# EAGLE board board (EAGLE 9.1.3)
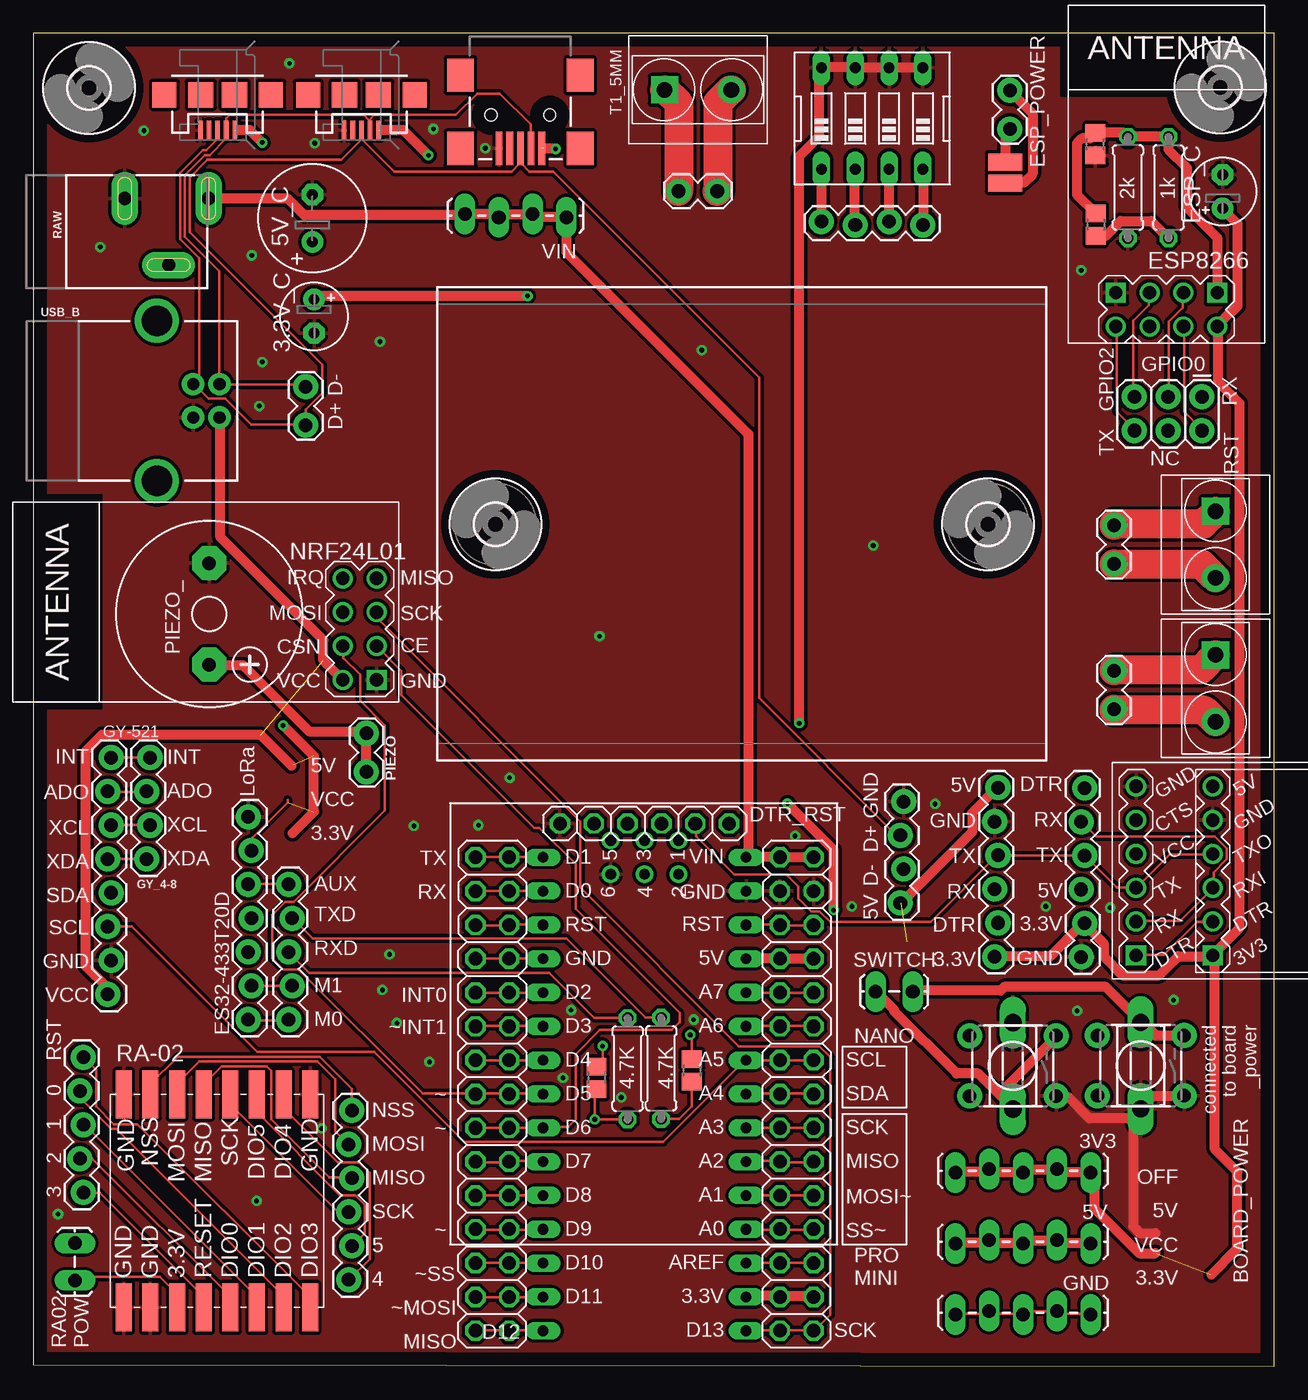
[diagram p0: board, top side]
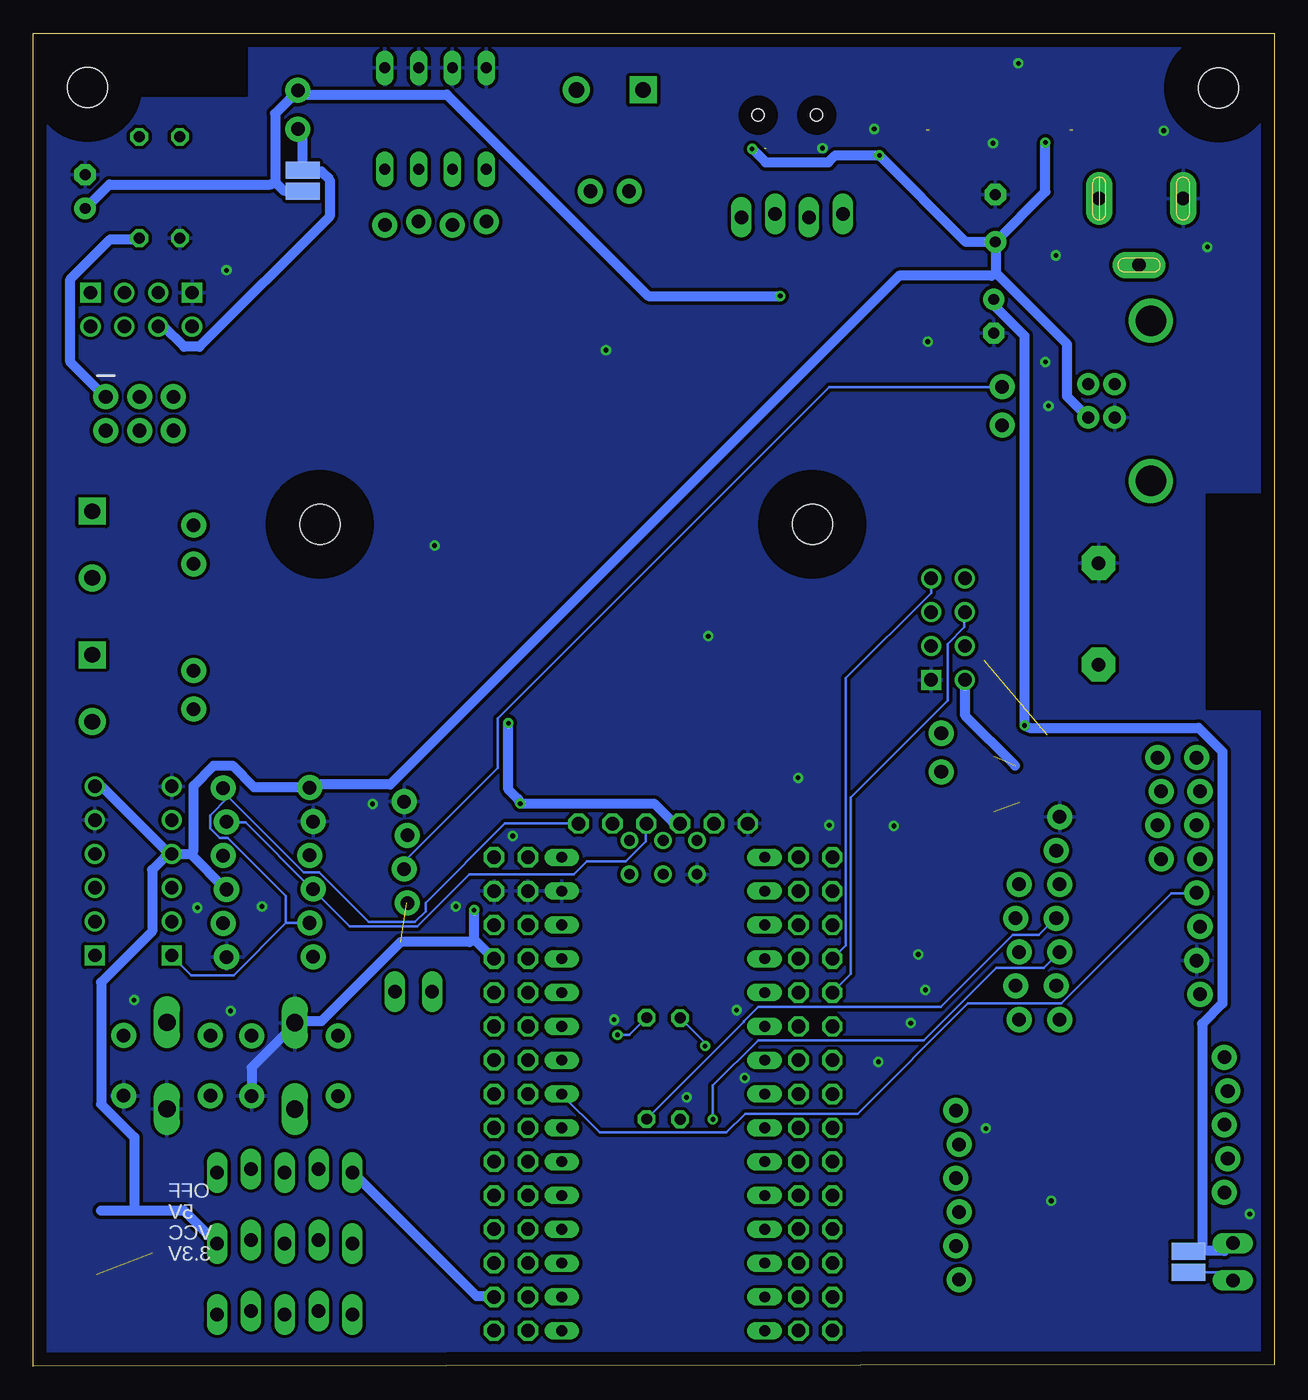
[diagram p1: board, bottom side, seen from below]

Size 93.2 x 100.13 mm. Coordinates in mm from the lower left corner, seen from the top.
Outline: 0,0.13 93.2,0 93.2,100.13 0,100.13 0,0.13
Copper layers (1*16): Top 0.035mm / dielectric 1.5mm / Bottom 0.035mm
Design rules "default": minimum track width 6mil, minimum drill 0.35mm, track to track 6mil, track to pad 6mil, pad to pad 6mil, via to via 6mil, smd to smd 6mil, copper to edge 40mil, drill to drill 6mil, minimum pad ring 10mil, minimum via ring 8mil, stop-mask expansion 4mil, vias tented up to drill 0mil, thermal gap 10mil
Net classes: 0 default: width 0.203 mm, drill 0.127 mm, clearance 0.152 mm; 1 power: width 0.762 mm, clearance 0.254 mm; 2 terminal: width 2.159 mm, clearance 0.305 mm
tRestrict: area 0.5,49.4 to 5.1,65.5; area 77.1,95.4 to 92.6,99.2
bRestrict: area 0.5,49.4 to 5.1,65.5; area 77.1,95.4 to 92.6,99.2

## Footprints (pad centres in the part's own frame; a part is rotated, then mirrored left to right if it is on the bottom)
1X05_LOCK_LONGPADS = drill 1.016 long: 1 0,0; 2 2.54,-0.254; 3 5.08,0; 4 7.62,-0.254; 5 10.16,0
E2,5-5 = drill 0.813 pad 1.6: + -1.27,0 | drill 0.813 pad 1.6 octagon: - 1.27,0
E3,5-8 = drill 0.813 pad 1.6: + -1.778,0 | drill 0.813 pad 1.6 octagon: - 1.778,0
USB-SERIAL-CP2102 = drill 1 square: 1 8.89,6.35 | drill 1: 2 8.89,3.81; 3 8.89,1.27; 4 8.89,-1.27; 5 8.89,-3.81; 6 8.89,-6.35
1X07_LOCK = drill 1.016 pad 1.88: 1 0,0.127; 2 2.54,-0.127; 3 5.08,0.127; 4 7.62,-0.127; 5 10.16,0.127; 6 12.7,-0.127; 7 15.24,0.127
0207/7 = drill 0.813 octagon: 1 -3.81,0; 2 3.81,0
R2012 = smd 1.3 x 1.5: 1 -0.85,0; 2 0.85,0
WIRELESS-WIFI-ESP-01 = drill 1 square: A1 -8.89,3.81; D1 -8.89,-3.81 | drill 1: A2 -11.43,3.81; B1 -8.89,1.27; B2 -11.43,1.27; C1 -8.89,-1.27; C2 -11.43,-1.27; D2 -11.43,-3.81
2X3 = drill 1.016 pad 1.88: 1 0,0; 2 0,2.54; 3 2.54,0; 4 2.54,2.54; 5 5.08,0; 6 5.08,2.54
1X02_LOCK = drill 1.016 pad 1.88: 1 -0.178,0; 2 2.718,0
1X08_LOCK = drill 1.016 pad 1.88: 1 0,0.127; 2 2.54,-0.127; 3 5.08,0.127; 4 7.62,-0.127; 5 10.16,0.127; 6 12.7,-0.127; 7 15.24,0.127; 8 17.78,-0.127
1X04_LOCK = drill 1.016 pad 1.88: 1 0,0.127; 2 2.54,-0.127; 3 5.08,0.127; 4 7.62,-0.127
3,0 = hole 3: 0,0
1X05_LOCK = drill 1.016 pad 1.88: 1 0,0.127; 2 2.54,-0.127; 3 5.08,0.127; 4 7.62,-0.127; 5 10.16,0.127
1X02_LOCK_LONGPADS = drill 1.016 long: 1 -0.127,0; 2 2.667,0
1X06_LOCK = drill 1.016 pad 1.88: 1 0,0; 2 2.54,-0.254; 3 5.08,0; 4 7.62,-0.254; 5 10.16,0; 6 12.7,-0.254
USB-MICROB = smd 1.4 x 0.35: D+ -2.65,0; D- -2.65,-0.65; GND -2.65,1.3; ID -2.65,0.65; VBUS -2.65,-1.3 | smd 1.9 x 1.8: MT1 0,-4; MT2 0,4 | smd 1.9 x 1.9: P$1 0,-1.27; P$2 0,1.27
USB-MINIB = smd 2.5 x 0.5: D+ 2.5,0; D- 2.5,0.8; GND 2.5,-1.6; ID 2.5,-0.8; VBUS 2.5,1.6 | smd 2.5 x 2: S1 -3,4.5; S2 2.5,4.5; S3 -3,-4.5; S4 2.5,-4.5 | hole 0.9: 0,2.2; 0,-2.2
NANO = drill 0.8 long: 3.3V -10.16,24.13; 5V -10.16,-1.27; A0 -10.16,19.05; A1 -10.16,16.51; A2 -10.16,13.97; A3 -10.16,11.43; A4 -10.16,8.89; A5 -10.16,6.35; A6 -10.16,3.81; A7 -10.16,1.27; AREF -10.16,21.59; D2 5.08,1.27; D3 5.08,3.81; D4 5.08,6.35; D5 5.08,8.89; D6 5.08,11.43; D7 5.08,13.97; D8 5.08,16.51; D9 5.08,19.05; D10 5.08,21.59; D11 5.08,24.13; D12 5.08,26.67; D13 -10.16,26.67; GND -10.16,-6.35; GND1 5.08,-1.27; RAW -10.16,-8.89; RST -10.16,-3.81; RST1 5.08,-3.81; RX1 5.08,-6.35; TX0 5.08,-8.89 | drill 0.8: ICSP1 -5.08,-10.16; ICSP2 -5.08,-7.62; ICSP3 -2.54,-10.16; ICSP4 -2.54,-7.62; ICSP5 0,-10.16; ICSP6 0,-7.62
WIRELESS-NRF24L01 = drill 1 square: 1 -12.7,6.35 | drill 1: 2 -10.16,6.35; 3 -12.7,3.81; 4 -10.16,3.81; 5 -12.7,1.27; 6 -10.16,1.27; 7 -12.7,-1.27; 8 -10.16,-1.27
SMD1,27-2,54 = smd 1.27 x 2.54: 1 0,0
2X15 = drill 1.016 octagon: 1 -17.78,-1.27; 2 -17.78,1.27; 3 -15.24,-1.27; 4 -15.24,1.27; 5 -12.7,-1.27; 6 -12.7,1.27; 7 -10.16,-1.27; 8 -10.16,1.27; 9 -7.62,-1.27; 10 -7.62,1.27; 11 -5.08,-1.27; 12 -5.08,1.27; 13 -2.54,-1.27; 14 -2.54,1.27; 15 0,-1.27; 16 0,1.27; 17 2.54,-1.27; 18 2.54,1.27; 19 5.08,-1.27; 20 5.08,1.27; 21 7.62,-1.27; 22 7.62,1.27; 23 10.16,-1.27; 24 10.16,1.27; 25 12.7,-1.27; 26 12.7,1.27; 27 15.24,-1.27; 28 15.24,1.27; 29 17.78,-1.27; 30 17.78,1.27
F/CM12P = drill 1.016 pad 2.54 octagon: + 3.81,0; - -3.81,0
1X06/OCT = drill 1.016 octagon: 1 -6.35,0; 2 -3.81,0; 3 -1.27,0; 4 1.27,0; 5 3.81,0; 6 6.35,0
LORA-RA2-SMD = smd 3.6 x 1.2: 1 -8,7; 2 -8,5; 3 -8,3; 4 -8,1; 5 -8,-1; 6 -8,-3; 7 -8,-5; 8 -8,-7; 9 8,-7; 10 8,-5; 11 8,-3; 12 8,-1; 13 8,1; 14 8,3; 15 8,5; 16 8,7
POWER_JACK_SLOT = drill 1 pad 2 long: GND@1 2.58,7.5; GND@2 7.58,10.8; PWR 2.58,13.8
TACTILE_SWITCH_PTH_6.0MM = drill 1.016 pad 1.88: 1 -3.251,2.261; 2 3.251,2.261; 3 -3.251,-2.261; 4 3.251,-2.261
DTS-3 = drill 1.3 long: 1 -3.25,0; 2 3.25,0
EDG-04 = drill 0.813 long: 1 -3.81,-3.81; 2 -1.27,-3.81; 3 1.27,-3.81; 4 3.81,-3.81; 5 3.81,3.81; 6 1.27,3.81; 7 -1.27,3.81; 8 -3.81,3.81
H2-5.0-10.5X8.0MM = drill 1.168 pad 2.032 square: 1 0,2.5 | drill 1.168 pad 2.032: 2 0,-2.5
USB-SERIAL-FT232R = drill 1 square: 1 11.43,6.35 | drill 1: 2 11.43,3.81; 3 11.43,1.27; 4 11.43,-1.27; 5 11.43,-3.81; 6 11.43,-6.35
USB-B-PTH = drill 0.914 pad 1.676: D+ 4,1.25; D- 5.981,1.25; GND 4,-1.25; VBUS 5.981,-1.25 | drill 2.286: SHLD1 1.282,-6.02; SHLD2 1.282,6.02
1X04_LOCK_LONGPADS = drill 1.016 long: 1 0,0; 2 2.54,-0.254; 3 5.08,0; 4 7.62,-0.254

## Placement (x,y rotation side)
3.3V  [1X05_LOCK_LONGPADS]  79.4,14.55 180 top
3.3V_C  [E2,5-5]  21.08,78.87 270 top
5V  [1X05_LOCK_LONGPADS]  79.4,9.22 180 top
5V_C  [E3,5-8]  20.95,86.23 90 top
B1  BREADBOARDMINI  [BREADBOARD-MINI]  53.19,63.27 180 top
CP2102_USB-SERIAL  USB-SERIAL-CP2102  [USB-SERIAL-CP2102]  97.46,37.21 180 top
ES32-433T20D  [1X07_LOCK]  16.26,26.04 90 top
ESP1  1k  [0207/7]  85.24,88.54 270 top
ESP1_1  [R2012]  79.78,85.75 270 top
ESP2  2k  [0207/7]  82.19,88.54 90 top
ESP2_1  [R2012]  79.76,91.8 90 top
ESP8266  [WIRELESS-WIFI-ESP-01]  85.09,89.53 90 top
ESP_C  [E2,5-5]  89.31,88.24 90 top
ESP_H  [2X3]  87.76,72.82 180 top
ESP_POW  [1X02_LOCK]  73.33,95.66 270 top
GND  [1X05_LOCK_LONGPADS]  79.4,3.89 180 top
GY-521  [1X08_LOCK]  5.71,27.94 90 top
GY_4-8  [1X04_LOCK]  8.64,45.72 270 top
H1  MOUNT-HOLE3.0  [3,0]  4.19,96.01 0 top
H2  MOUNT-HOLE3.0  [3,0]  89.13,96.06 0 top
H3  MOUNT-HOLE3.0  [3,0]  71.68,63.25 90 top
H4  MOUNT-HOLE3.0  [3,0]  34.7,63.25 270 top
J1  [1X05_LOCK]  19.3,26.04 90 top
J2  [1X02_LOCK_LONGPADS]  65.91,28.14 180 top
J3  [1X02_LOCK_LONGPADS]  3.12,9.12 270 top
J4  [1X04_LOCK]  66.8,85.85 180 top
J5  [1X06_LOCK]  23.93,19.2 270 top
J6  [1X05_LOCK]  3.63,23.22 270 top
J7  [1X06_LOCK]  78.69,30.73 90 top
J8  [1X04_LOCK]  65.23,34.8 90 top
J9  [1X06_LOCK]  72.19,30.76 90 top
MICRO_1  [USB-MICROB]  24.64,95.5 90 top
MICRO_2  [USB-MICROB]  13.84,95.5 90 top
MINI_1  USB_MINI-B_SMT  [USB-MINIB]  36.58,93.98 270 top
NANO  NANO  [NANO]  43.36,29.34 180 top
NRF24L01  [WIRELESS-NRF24L01]  13.08,57.91 180 top
PAD1  [SMD1,27-2,54]  72.97,88.87 90 top
PAD2  [SMD1,27-2,54]  72.97,90.45 90 top
PAD3  [SMD1,27-2,54]  6.45,8.64 90 bottom
PAD4  [SMD1,27-2,54]  6.45,7.06 90 bottom
PAD5  [SMD1,27-2,54]  72.97,88.27 90 bottom
PAD6  [SMD1,27-2,54]  72.97,89.84 90 bottom
PH1  [2X15]  57.33,20.45 90 top
PH2  [2X15]  34.47,20.45 90 top
PIEZO  [1X02_LOCK]  25.02,44.83 90 top
PIEZO_  [F/CM12P]  13.21,56.52 270 top
PIN1  [1X02_LOCK]  51.18,88.27 180 top
PIN2  [1X02_LOCK]  81.15,60.45 90 top
PIN3  [1X02_LOCK]  81.15,49.53 90 top
PROMINI_H  [1X06/OCT]  45.9,40.77 0 top
R1  4.7k  [0207/7]  47.14,22.38 270 top
R1_1  [R2012]  49.45,22.22 270 top
R2  4.7K  [0207/7]  44.63,22.35 270 top
R2_1  [R2012]  42.29,21.67 270 top
RA-02  [LORA-RA2-SMD]  13.79,12.42 90 top
RAW  [POWER_JACK_SLOT]  -0.64,90.3 270 top
S1  MOMENTARY-SWITCH-SPST-PTH-6.0MM  [TACTILE_SWITCH_PTH_6.0MM]  83.16,22.58 180 top
S2  MOMENTARY-SWITCH-SPST-PTH-6.0MM  [TACTILE_SWITCH_PTH_6.0MM]  73.56,22.56 180 top
S3  DTS-3  [DTS-3]  83.16,22.58 90 top
S4  DTS-3  [DTS-3]  73.56,22.56 90 top
SW1  [EDG-04]  62.99,93.73 0 top
T1_5MM  5mm  [H2-5.0-10.5X8.0MM]  49.91,95.88 90 top
T2_5MM  5mm  [H2-5.0-10.5X8.0MM]  88.77,61.72 0 top
T3_5MM  5mm  [H2-5.0-10.5X8.0MM]  88.77,50.93 0 top
U$1  USB-SERIAL-FT232R  [USB-SERIAL-FT232R]  94.23,37.21 180 top
USB_B  [USB-B-PTH]  8,72.52 0 top
USB_DATA  [1X02_LOCK]  20.45,73.41 270 top
VIN  [1X04_LOCK_LONGPADS]  32.41,86.56 0 top

## Library data of the parts
3.3V 5V ES32-433T20D ESP_POW GND GY-521 J1-J3 J5-J7 J9 PIEZO PIN1-PIN3 USB_DATA = SparkFun-Connectors
3.3V_C ESP_C = rcl; SPICEPREFIX: C
5V_C = resistor
B1 = SparkFun-Boards; PROD_ID: COMP-12034
CP2102_USB-SERIAL ESP8266 NRF24L01 U$1 = diy-modules
ESP1 ESP1_1 ESP2 ESP2_1 R1 R1_1 R2 R2_1 = rcl; SPICEPREFIX: R
ESP_H = SparkFun-Connectors; PROD_ID: CONN-11566; VALUE: FEMALE 2x3
GY_4-8 J4 J8 VIN = SparkFun-Connectors; PROD_ID: CONN-09696
H1-H4 = holes
MICRO_1 MICRO_2 = SparkFun-Connectors; PROD_ID: CONN-09505; SF_ID: PRT-08533
MINI_1 = SparkFun-Connectors; PROD_ID: CONN-08193; SF_ID: PRT-00587
NANO = Arduino-clone
PAD1-PAD6 = wirepad
PH1 PH2 = pinhead
PIEZO_ = buzzer; OC_FARNELL: unknown; OC_NEWARK: unknown
PROMINI_H = pinhead_v2
RA-02 = LikeCircuit
RAW = SparkFun-Connectors; PROD_ID: PRT-00119
S1 S2 = SparkFun-Switches; PROD_ID: SWCH-08441; SF_SKU: COM-00097
S3 S4 = switch-tact
SW1 = special
T1_5MM T2_5MM T3_5MM = Seeed-Connector
USB_B = SparkFun-Connectors; PROD_ID: CONN-08278; SF_ID: PRT-00139

## Nets
3.3V [power]: 3.3V.1 3.3V.2 3.3V.3 3.3V.4 3.3V.5 3.3V_C.+ CP2102_USB-SERIAL.1 ES32-433T20D.6 ESP8266.D2 ESP_C.+ ESP_POW.1 J3.1 J7.2 J9.1 NANO.3.3V NRF24L01.2 PAD1.1 PAD3.1 PAD5.1 PH1.3 PH1.4
5V [power]: 5V.1 5V.2 5V.3 5V.4 5V.5 5V_C.+ CP2102_USB-SERIAL.6 GY-521.1 J7.3 J8.1 J9.6 MICRO_1.VBUS MICRO_2.VBUS MINI_1.VBUS NANO.5V PH1.23 PH1.24 PROMINI_H.3 U$1.4 USB_B.VBUS
A5: GY-521.3 NANO.A5 PH1.17 PH1.18
A6: NANO.A6 PH1.19 PH1.20
A7: NANO.A7 PH1.21 PH1.22
CE_NRF: NANO.D6 NRF24L01.3 PH2.13 PH2.14
CSN_NRF: NANO.D5 NRF24L01.4 PH2.15 PH2.16
D+_5PIN: J8.3 MICRO_1.D+ MICRO_2.D+ MINI_1.D+ USB_B.D+ USB_DATA.2
D-_5PIN: J8.2 MICRO_1.D- MICRO_2.D- MINI_1.D- USB_B.D- USB_DATA.1
GND [power]: 3.3V_C.- 5V_C.- CP2102_USB-SERIAL.5 ES32-433T20D.7 ESP2.1 ESP2_1.1 ESP8266.A1 ESP_C.- GY-521.2 J7.1 J8.4 J9.5 MICRO_1.GND MICRO_2.GND MINI_1.GND NANO.GND NANO.ICSP6 NRF24L01.1 PH1.27 PH1.28 PIEZO_.- PROMINI_H.1 RA-02.1 RA-02.2 RA-02.9 RA-02.16 RAW.GND@1 S1.1 S2.1 S3.1 S4.2 SW1.5 SW1.6 SW1.7 SW1.8 U$1.6 USB_B.GND
MISO_NRF: NANO.GND1 NRF24L01.7 PH2.23 PH2.24
MOSI_NRF: NANO.D2 NRF24L01.6 PH2.21 PH2.22
N$1: ES32-433T20D.2 J1.2
N$2: GY-521.5 GY_4-8.4
N$3: NANO.AREF PH1.5 PH1.6
N$4: NANO.A0 PH1.7 PH1.8
N$5: NANO.A1 PH1.9 PH1.10
N$6: NANO.A2 PH1.11 PH1.12
N$7: NANO.A3 PH1.13 PH1.14
N$8: GY-521.6 GY_4-8.3
N$9: GY-521.7 GY_4-8.2
N$10: GY-521.8 GY_4-8.1
N$12: ES32-433T20D.1 J1.1
N$13: J1.4 R1.1 R1_1.1
N$14: J1.3 R2.1 R2_1.1
N$15: ES32-433T20D.4 R1.2 R1_1.2
N$16: NANO.D12 PH2.1 PH2.2
N$17: NANO.D11 PH2.3 PH2.4
N$18: NANO.D10 PH2.5 PH2.6
N$19: NANO.D9 PH2.7 PH2.8
N$20: NANO.D8 PH2.9 PH2.10
N$21: NANO.D7 PH2.11 PH2.12
N$22: ES32-433T20D.5 J1.5
N$23 [terminal]: PIN1.2 T1_5MM.1
N$24: NANO.D4 PH2.17 PH2.18
N$25: NANO.D3 PH2.19 PH2.20
N$26 [terminal]: PIN1.1 T1_5MM.2
N$27 [terminal]: PIN2.2 T2_5MM.1
N$28: NANO.RST1 PH2.25 PH2.26
N$29: NANO.RX1 PH2.27 PH2.28
N$30: NANO.TX0 PH2.29 PH2.30
N$31 [terminal]: PIN2.1 T2_5MM.2
N$32 [terminal]: PIN3.2 T3_5MM.1
N$33 [terminal]: PIN3.1 T3_5MM.2
N$34 [power]: PIEZO.1 PIEZO.2 PIEZO_.+
N$35: GND.1 GND.2 GND.3 GND.4 GND.5
N$37 [power]: J2.1 S1.3 S3.2
N$38: ES32-433T20D.3 R2.2 R2_1.2
N$39 [power]: J4.1 SW1.4
N$40 [power]: J4.2 SW1.3
N$41 [power]: J4.3 SW1.2
N$42 [power]: J4.4 SW1.1
N$43 [power]: J2.2 S2.3 S4.1
N$44: J6.1 RA-02.8
N$45: J6.2 RA-02.7
N$46: J6.3 RA-02.6
N$47: J6.4 RA-02.5
N$48: J6.5 RA-02.4
N$49: J5.1 RA-02.15
N$50: J5.2 RA-02.14
N$51: J5.3 RA-02.13
N$52: J5.4 RA-02.12
N$53: J5.5 RA-02.11
N$54: J5.6 RA-02.10
N$55 [power]: ESP8266.B2 ESP_POW.2 PAD2.1 PAD6.1
N$57: CP2102_USB-SERIAL.3 J7.5 J9.3 PROMINI_H.4 U$1.2
N$58 [power]: ESP1.1 ESP1_1.1 ESP2.2 ESP2_1.2 ESP8266.D1
N$59: ESP8266.C2 ESP_H.2
N$60: ESP8266.C1 ESP_H.3
N$61 [power]: ESP1.2 ESP1_1.2 ESP_H.1
N$62: CP2102_USB-SERIAL.4 J7.4 J9.4 PROMINI_H.5 U$1.3
N$63: ESP8266.B1 ESP_H.5
N$64: ESP8266.A2 ESP_H.6
N$66: CP2102_USB-SERIAL.2 J7.6 J9.2 PROMINI_H.6 U$1.1
N$76: J3.2 PAD4.1 RA-02.3
RST: NANO.RST PH1.25 PH1.26
SCK_NRF: NANO.D13 NRF24L01.5 PH1.1 PH1.2
SDA_GY521: GY-521.4 NANO.A4 PH1.15 PH1.16
VIN [power]: NANO.RAW PH1.29 PH1.30 RAW.PWR VIN.1 VIN.2 VIN.3 VIN.4

## Tracks (layer width: path | path; a pad name or v marks a point on that pad's centre or on a via)
3.3V  (via drill 0.35)  (3 unrouted)
  Top 0.203: 19.11,42.53 19.11,42.35 16.45,39.69 16.45,38.8 ES32-433T20D.6
  Top 0.762: v18.76,48.13 21.07,45.82 21.07,41.64 19.47,40.04 | PAD1.1 72.99,88.94 74.41,88.94 75.03,89.56 75.03,94.09 73.34,95.78 ESP_POW.1 | ESP_C.+ 89.34,86.89 90.41,85.83 90.41,79.6 90.06,79.25 89.97,79.25 88.9,78.18 ESP8266.D2 88.99,77.74 88.99,73.91 90.59,72.31 90.59,32.93 88.81,31.15 CP2102_USB-SERIAL.1 | CP2102_USB-SERIAL.1 88.54,30.8 85.97,30.8 84.54,29.38 81.79,29.38 80.37,30.8 80.37,31.77 78.94,33.2 J7.2 78.59,33.02 76.36,30.8 72.19,30.8 J9.1 | NANO.3.3V 53.52,5.28 56.01,5.28 PH1.4 56.45,5.28 58.59,5.28 PH1.3 | 3.3V.5 69.25,14.62 71.56,14.62 71.74,14.79 3.3V.4 72.1,14.62 74.32,14.62 3.3V.3 74.68,14.79 76.81,14.79 3.3V.2 77.17,14.62 79.39,14.62 3.3V.1 79.65,14.26 79.65,11.86 83.03,8.48 84.28,8.48 | 88.46,6.88 90.41,8.84 90.41,14.62 88.72,16.31 88.72,30.44 CP2102_USB-SERIAL.1 | v37.11,80.39 21.41,80.39 21.16,80.14 3.3V_C.+
  Bottom 0.762: J3.1 3.2,9.2 3.73,8.66 6.4,8.66 PAD3.1 5.42,9.02 5.42,25.73 3.91,27.24 3.91,46.18 5.69,47.96 18.4,47.96 v18.76,48.13 18.76,77.38 21.07,79.69 21.07,80.14 3.3V_C.+ | 75.03,88.94 74.41,88.32 72.99,88.32 PAD5.1 | 75.03,88.94 75.03,94.09 73.34,95.78 ESP_POW.1 73.08,95.52 62.14,95.52 47.02,80.39 v37.11,80.39 | 75.03,88.94 75.39,88.76 87.48,88.76 89.26,86.98 ESP_C.+ | PH1.3 58.67,5.28 59.92,5.28 69.16,14.53 3.3V.5 | 19.47,45.11 23.2,48.84 23.2,51.51 NRF24L01.2
5V  (via drill 0.35)  (5 unrouted)
  Top 0.762: 5V.5 69.25,9.28 71.56,9.28 71.74,9.46 5V.4 72.1,9.28 74.32,9.28 5V.3 74.68,9.46 76.81,9.46 5V.2 77.17,9.28 79.39,9.28 5V.1 | J8.1 65.16,34.8 70.5,40.13 70.5,41.55 72.36,43.42 J9.6 | 19.38,45.11 17.07,47.42 5.16,47.42 3.91,46.18 3.91,30.09 5.51,28.49 5.51,27.95 GY-521.1 | 23.2,51.6 21.78,53.02 21.78,54.53 14.05,62.27 14.05,71.25 USB_B.VBUS | v17.2,91.92 16.26,92.85 15.35,92.85 | v29.67,90.96 27.77,92.85 26.15,92.85 | v39.22,91.44 38.35,91.44 38.31,91.48 | NANO.5V 53.52,30.62 56.01,30.62 PH1.24 56.45,30.62 58.59,30.62 PH1.23 | v56.63,42.27 60.1,38.8 v60.1,34.27 | 59.03,97.21 59.03,92.41 57.52,90.89 v57.52,48.31
  Bottom 0.762: 85.61,11.68 81.88,11.68 79.48,9.28 5V.1 | 85.61,11.68 88.1,11.68 | 81.34,38.44 82.77,38.44 U$1.4 | 81.34,38.44 78.77,35.87 J7.3 | CP2102_USB-SERIAL.6 88.54,43.51 88.01,43.51 83.12,38.62 U$1.4 | 81.34,38.44 81.17,38.8 81.17,43.6 79.65,45.11 78.23,45.11 76.63,43.51 72.45,43.51 J9.6 72.1,43.69 66.41,43.69 28.18,81.91 21.25,81.91 20.89,82.09 | 85.61,11.68 85.61,12.04 85.61,17.2 88.1,19.68 88.1,28.84 84.28,32.66 84.28,37.29 83.3,38.27 U$1.4 | 20.89,82.09 20.89,84.4 5V_C.+ | 20.89,82.09 15.56,76.76 15.56,72.85 14.05,71.34 USB_B.VBUS | 5V_C.+ 17.2,88.21 v17.2,91.92 | 5V_C.+ 23.16,84.45 v29.67,90.96 32.96,90.96 33.49,90.43 38.2,90.43 v39.22,91.44 | 60.1,32.04 v60.1,34.27 | 60.1,32.04 58.67,30.62 PH1.23 | PROMINI_H.3 44.63,40.84 45.16,40.84 46.58,42.27 v56.63,42.27 56.81,42.62 57.52,43.33 v57.52,48.31 | 73.17,25.91 71.56,25.91 65.61,31.86 60.45,31.86 60.1,32.04
A5
  Top 0.203: PH1.17 58.59,22.97 56.1,22.97 PH1.18 56.01,22.97 53.52,22.97 NANO.A5 53.43,22.97 47.3,16.84 32.36,16.84 25.6,23.6 16.8,23.6 7.38,33.02 GY-521.3
A6
  Top 0.203: NANO.A6 53.52,25.55 56.01,25.55 PH1.20 56.1,25.55 58.59,25.55 PH1.19
A7
  Top 0.203: NANO.A7 53.52,28.04 56.01,28.04 PH1.22 56.1,28.04 58.59,28.04 PH1.21
CE_NRF
  Top 0.203: NRF24L01.3 27.64,52.23 27.64,50.42 37.6,40.45 38,40.45 40.72,37.73 40.72,34.35 48.54,26.53 48.54,25.82 48.5,25.82 47.93,25.25 42.53,25.25 40.72,23.44 40.72,18.55 40.16,18 38.32,18 NANO.D6 PH2.13 PH2.14
CSN_NRF
  Top 0.203: NANO.D5 38.23,20.48 35.74,20.48 PH2.15 35.65,20.48 33.25,20.48 PH2.16 33.16,20.48 29.25,20.48 19.91,29.82 18.76,29.82 17.96,30.62 17.96,33.91 18.94,34.89 19.56,34.89 26.4,41.73 26.4,48.13 24.54,50 24.54,51.96 23.29,53.2 23.29,54.09 NRF24L01.4
D+_5PIN
  Top 0.203: MICRO_2.D+ 13.78,92.85 13.78,92.14 12.98,91.34 12.71,91.34 11.02,89.65 11.02,84.67 12.45,83.25 12.45,74.27 12,73.82 USB_B.D+ 12.09,73.74 13.16,72.67 14.4,72.67 16.36,70.71 20.45,70.71 USB_DATA.2 20.45,70.8 20.45,71.87 21.69,73.11 21.69,75.25 11.73,85.2 11.73,89.29 13.07,90.63 23.11,90.63 24.62,92.14 24.71,92.14 | 24.71,92.14 24.71,92.85 MICRO_1.D+ | 24.71,92.14 27.11,89.74 35.92,89.74 36.54,90.36 36.54,91.43 MINI_1.D+ 36.63,90.36 37.25,89.74 39.03,89.74 54.5,74.27 54.5,50.18 64.72,39.95 65.08,39.95 J8.3
D-_5PIN
  Top 0.203: 25.2,93.6 25.25,93.56 25.25,92.94 MICRO_1.D- | 25.2,93.6 24.8,94 14.76,94 14.49,93.74 14.49,92.94 MICRO_2.D- 14.49,92.76 14.49,92.23 13.25,90.98 12.89,90.98 11.38,89.47 11.38,84.85 13.96,82.27 13.96,73.82 USB_B.D- 14.05,73.74 20.36,73.74 20.45,73.65 USB_DATA.1 | MINI_1.D- 37.34,91.52 37.34,93.29 35.03,95.61 33.34,95.61 31.74,94 25.6,94 25.25,93.65 25.2,93.6
  Bottom 0.203: J8.2 65.34,37.38 65.34,37.91 58.32,44.93 58.32,48.67 33.43,73.56 20.45,73.56 USB_DATA.1
GND  (via drill 0.35)
  Top 0.762: S1.1 84.1,20.31 83.21,19.42 S3.1 | 84.28,10 83.12,10 82.59,10.53 82.59,18.53 83.03,18.97 S3.1 | S2.1 76.81,20.22 77.7,20.22 79.3,18.62 82.23,18.62 S3.1 | SW1.8 59.21,97.56 61.7,97.56 SW1.7 62.05,97.56 64.19,97.56 SW1.6 64.63,97.56 66.76,97.56 SW1.5
  Bottom 0.762: S2.1 76.81,22.44 73.52,25.73 S4.2
  other vias: 21.67,17.86 21.13,91.87 33.93,91.49 16.76,12.42 26.75,30.94 29.74,22.86 49.58,26.04 17.2,75.44 16.97,72.14 30.05,92.94 50.19,76.33 27.3,25.78 39.78,21.67 57.2,39.83 26.21,28.27 63.07,61.65 42.52,54.84 35.76,44.2 28.57,40.59 33.43,40.64 5.03,84.07 16.41,83.44 19.23,97.87 8.31,92.81 78.69,82.32 80.87,34.44 85.62,27.51 78.38,26.7 40.39,26.75 1.85,11.43 26.04,76.96 67.72,42.24 61.47,34.54 76.02,34.54 44.15,20.19
  pour Top: 0.13,100.08 0.13,0.13 93.22,0.13 93.22,100.08
  pour Bottom: 0,99.95 0,0 93.22,0 93.22,99.95 0,100.08
MISO_NRF
  Top 0.203: NANO.GND1 38.23,30.62 35.74,30.62 PH2.23 35.65,30.62 33.25,30.62 PH2.24
  Bottom 0.203: NRF24L01.7 25.78,59.16 25.78,58.09 32.18,51.69 32.18,31.6 33.16,30.62 PH2.24
MOSI_NRF
  Top 0.203: NANO.D2 38.23,28.04 35.74,28.04 PH2.21 35.65,28.04 33.25,28.04 PH2.22
  Bottom 0.203: NRF24L01.6 23.29,56.58 23.29,55.51 24.54,54.27 24.54,50 31.83,42.71 31.83,29.46 33.16,28.13 PH2.22
N$1
  Top 0.203: ES32-433T20D.2 16.45,28.57 19.38,28.57 J1.2
N$2
  Top 0.203: GY-521.5 8.45,38.09 GY_4-8.4
N$3
  Top 0.203: NANO.AREF 53.52,7.77 56.01,7.77 PH1.6 56.1,7.77 58.59,7.77 PH1.5
N$4
  Top 0.203: NANO.A0 53.52,10.26 56.01,10.26 PH1.8 56.1,10.26 58.59,10.26 PH1.7
N$5
  Top 0.203: NANO.A1 53.52,12.84 56.01,12.84 PH1.10 56.1,12.84 58.59,12.84 PH1.9
N$6
  Top 0.203: NANO.A2 53.52,15.42 56.01,15.42 PH1.12 56.1,15.33 58.59,15.33 PH1.11
N$7
  Top 0.203: NANO.A3 56.01,17.91 PH1.14 56.1,17.91 58.59,17.91 PH1.13
N$8
  Top 0.203: GY-521.6 5.87,40.66 8.71,40.66 GY_4-8.3
N$9
  Top 0.203: GY-521.7 5.6,43.16 8.45,43.16 GY_4-8.2
N$10
  Top 0.203: GY-521.8 5.87,45.73 8.71,45.73 GY_4-8.1
N$12
  Top 0.203: ES32-433T20D.1 16.18,26 19.11,26 J1.1
N$13  (via drill 0.35)  (1 unrouted)
  Top 0.203: R1.1 47.07,26.2 45.94,26.2 40.01,32.13 20.98,32.13 19.47,33.64 J1.4 | v49.33,24.89 49.45,24.77 R1_1.1
  Bottom 0.203: R1.1 48.44,24.89 v49.33,24.89
N$14  (via drill 0.35)
  Top 0.203: R2.1 42.14,26.17 38.76,29.55 20.71,29.55 19.2,31.06 J1.3 | v42.75,24.05 42.75,22.97 R2_1.1
  Bottom 0.203: v42.75,24.05 42.75,24.28 R2.1
N$15
  Top 0.203: 49.45,20.88 R1_1.2 49.45,19.51 48.51,18.57 R1.2
  Bottom 0.203: ES32-433T20D.4 16.45,33.64 17.69,32.4 19.65,32.4 25.07,26.97 38.77,26.97 39.84,25.9 39.84,25.87 R1.2
N$16
  Top 0.203: NANO.D12 38.23,2.71 35.74,2.71 PH2.1 35.65,2.71 33.25,2.71 PH2.2
N$17
  Top 0.203: NANO.D11 38.23,5.19 35.74,5.19 PH2.3 35.65,5.19 33.25,5.19 PH2.4
N$18
  Top 0.203: NANO.D10 38.23,7.77 35.74,7.77 PH2.5 35.65,7.77 33.25,7.77 PH2.6
N$19
  Top 0.203: NANO.D9 38.23,10.26 35.74,10.26 PH2.7 35.65,10.26 33.25,10.26 PH2.8
N$20
  Top 0.203: NANO.D8 38.23,12.84 35.74,12.84 PH2.9 35.65,12.84 33.25,12.84 PH2.10
N$21
  Top 0.203: NANO.D7 38.23,15.42 35.74,15.42 PH2.11 35.65,15.33 33.25,15.33 PH2.12
N$22
  Top 0.203: ES32-433T20D.5 16.18,36.22 19.11,36.22 J1.5
N$23
  Top 2.159: PIN1.2 48.45,88.32 48.45,94.89 47.47,95.87 T1_5MM.1
N$24
  Top 0.203: NANO.D4 38.23,22.97 35.74,22.97 PH2.17 35.65,22.97 33.25,22.97 PH2.18
N$25
  Top 0.203: NANO.D3 38.23,25.55 35.74,25.55 PH2.19 35.65,25.55 33.25,25.55 PH2.20
N$26
  Top 2.159: PIN1.1 51.38,88.32 51.38,94.89 52.36,95.87 T1_5MM.2
N$27
  Top 2.159: PIN2.2 81.17,63.25 87.83,63.25 88.72,64.13 T2_5MM.1
N$28
  Top 0.203: NANO.RST1 38.23,33.2 35.74,33.2 PH2.25 35.65,33.11 33.25,33.11 PH2.26
N$29
  Top 0.203: NANO.RX1 38.23,35.69 PH2.27 35.65,35.69 33.25,35.69 PH2.28
N$30
  Top 0.203: NANO.TX0 38.23,38.27 35.74,38.27 PH2.29 35.65,38.27 33.25,38.27 PH2.30
N$31
  Top 2.159: PIN2.1 81.17,60.22 87.74,60.22 88.72,59.25 T2_5MM.2
N$32
  Top 2.159: PIN3.2 81.17,52.31 87.66,52.31 88.72,53.38 T3_5MM.1
N$33
  Top 2.159: PIN3.1 81.17,49.29 87.92,49.29 88.72,48.49 T3_5MM.2
N$34
  Top 0.762: PIEZO.1 24.98,44.67 24.98,47.51 PIEZO.2 24.62,47.69 20.71,47.69 15.73,52.67 13.25,52.67 PIEZO_.+
N$35
  Top 0.203: GND.5 69.25,3.95 71.56,3.95 71.74,4.13 GND.4 71.83,4.13 72.01,3.95 74.32,3.95 GND.3 74.41,3.95 74.59,4.13 76.81,4.13 GND.2 76.9,4.13 77.08,3.95 79.39,3.95 GND.1
N$37
  Top 0.762: J2.1 66.05,28.22 72.63,28.22 72.9,28.49 80.54,28.49 83.12,25.91 S3.2 83.48,25.64 84.28,24.84 S1.3
N$38  (via drill 0.35)
  Top 0.203: R2_1.2 42.35,20.82 42.16,20.63 v42.16,18.54 R2.2
  Bottom 0.203: 44.63,18.62 R2.2 | ES32-433T20D.3 16.18,31.06 17.34,29.91 20.89,29.91 26.31,24.49 38.63,24.49 38.76,24.49 42.16,21.08 v42.16,18.54
N$39
  Top 0.762: SW1.4 66.85,89.92 66.85,85.74 J4.1
N$40
  Top 0.762: SW1.3 64.28,89.92 64.28,86 J4.2
N$41
  Top 0.762: SW1.2 61.7,89.92 61.7,85.74 J4.3
N$42
  Top 0.762: SW1.1 59.21,89.92 59.21,86 J4.4
N$43
  Top 0.762: J2.2 63.3,28.13 64.63,26.8 64.63,26.71 69.34,22 70.94,22 73.61,19.33 S4.1 72.72,20.66 76.81,24.75 S2.3
N$44
  Top 0.203: RA-02.8 20.71,4.48 20.71,5.28 7.82,18.17 6.04,18.17 4.71,19.51 4.71,22.26 3.82,23.15 J6.1
N$45
  Top 0.203: RA-02.7 18.76,4.48 18.76,5.28 6.22,17.82 5.87,17.82 3.56,20.13 3.56,20.66 J6.2
N$46
  Top 0.203: RA-02.6 16.71,4.48 16.71,5.28 3.82,18.17 J6.3
N$47
  Top 0.203: RA-02.5 14.76,4.48 14.76,5.28 4.45,15.6 3.56,15.6 J6.4
N$48
  Top 0.203: RA-02.4 12.71,4.48 12.71,5.28 4.98,13.02 3.82,13.02 J6.5
N$49
  Top 0.203: RA-02.15 8.8,20.48 8.8,21.2 10.85,23.24 21.51,23.24 23.91,20.84 23.91,19.24 J5.1
N$50
  Top 0.203: RA-02.14 10.85,20.48 10.85,21.29 12.45,22.88 21.34,22.88 22.67,21.55 22.67,17.64 23.65,16.66 J5.2
N$51
  Top 0.203: RA-02.13 12.8,20.48 12.8,21.2 14.13,22.53 17.51,22.53 17.87,22.17 17.87,18.53 22.23,14.17 23.91,14.17 J5.3
N$52
  Top 0.203: RA-02.12 14.85,20.4 14.85,19.6 22.85,11.6 23.65,11.6 J5.4
N$53
  Top 0.203: RA-02.11 16.8,20.4 16.8,19.06 23.02,12.84 24.18,12.84 24.89,12.13 24.89,10 24,9.11 J5.5
N$54
  Top 0.203: RA-02.10 18.85,20.4 18.85,19.33 22.85,15.33 24.45,15.33 25.25,14.53 25.25,8.04 23.74,6.53 J5.6
N$55
  Top 0.762: PAD2.1 72.99,90.45 72.99,92.67 73.25,92.94 ESP_POW.2
  Bottom 0.762: ESP_POW.2 73.25,92.94 72.99,92.67 72.99,89.92 PAD6.1 72.63,89.74 71.56,89.74 70.94,89.12 70.94,86.36 80.72,76.58 81.88,76.58 83.39,78.09 83.74,78.09 ESP8266.B2
N$57
  Top 0.203: U$1.2 82.86,33.46 86.14,33.46 88.54,35.87 CP2102_USB-SERIAL.3 88.63,35.95 88.63,37.11 89.61,38.09 89.61,38.89 88.72,39.78 79.83,39.78 78.77,40.84 J7.5
  Bottom 0.203: PROMINI_H.4 47.21,40.75 47.21,39.42 48.72,37.91 51.65,37.91 52.63,36.93 60.45,36.93 64.36,33.02 69.43,33.02 72.19,35.78 J9.3 72.28,35.87 77.25,40.84 78.68,40.84 J7.5
N$58  (1 unrouted)
  Top 0.762: 82.27,92.39 82.2,92.34 | ESP8266.D1 88.9,84.78 86.61,87.07 86.61,90.02 85.24,91.39 ESP1.1 85.2,92.39 82.23,92.39 ESP2.2 81.9,92.65 ESP2_1.2 79.34,92.23 78.74,92.23 78.37,91.86 78.37,88.01 ESP1_1.1
N$59
  Top 0.203: ESP8266.C2 86.41,78.09 86.41,71.69 87.74,70.36 ESP_H.2
N$60
  Top 0.203: ESP8266.C1 86.32,80.58 86.32,79.52 85.25,78.45 85.25,72.85 ESP_H.3
N$61  (1 unrouted)
  Top 0.762: ESP1_1.2 80.53,84.9 81.66,86.03 83.95,86.03 ESP1.2
  Bottom 0.762: ESP1.2 85.3,84.66 87.4,84.66 90.41,81.65 90.41,75.42 87.83,72.85 ESP_H.1
N$62
  Top 0.203: CP2102_USB-SERIAL.4 88.54,38.44 85.34,38.44 82.86,35.95 U$1.3 82.77,35.95 81.34,35.95 J7.4 78.85,38.35 72.45,38.35 J9.4 72.36,38.35 67.39,33.38 59.83,33.38 59.03,34.18 58.41,34.18 57.43,35.15 57.43,36.04 56.54,36.93 52.63,36.93 49.78,39.78 49.78,40.75 PROMINI_H.5
N$63
  Top 0.203: ESP8266.B1 83.74,80.58 83.74,79.69 82.59,78.54 82.59,72.94 82.68,72.85 ESP_H.5
N$64
  Top 0.203: ESP8266.A2 81.34,78.09 81.34,71.69 82.68,70.36 ESP_H.6
N$66
  Top 0.203: U$1.1 82.86,30.89 84.9,30.89 87.39,33.38 88.54,33.38 CP2102_USB-SERIAL.2
  Bottom 0.203: 74.23,33.29 72.45,33.29 J9.2 | 74.23,33.29 78.14,29.38 81.34,29.38 82.77,30.8 U$1.1 | PROMINI_H.6 52.27,40.75 57.78,40.75 63.74,34.8 63.74,34.18 64.54,33.38 68.01,33.38 71.74,37.11 72.9,37.11 78.94,43.16 78.94,43.42 J7.6 78.59,42.71 79.92,41.38 79.92,40.4 79.21,39.69 78.59,39.69 74.23,35.33 74.23,33.38 74.23,33.29
N$76
  Top 0.203: RA-02.3 10.76,4.48 10.76,5.46 9.51,6.71 3.38,6.71 3.2,6.53 J3.2
  Bottom 0.203: PAD4.1 6.4,7.06 3.73,7.06 3.2,6.53 J3.2
RST
  Top 0.203: NANO.RST 53.52,33.2 56.01,33.2 PH1.26 56.1,33.11 58.59,33.11 PH1.25
SCK_NRF
  Top 0.203: NANO.D13 53.52,2.71 56.01,2.71 PH1.2 56.1,2.71 58.59,2.71 PH1.1 58.67,2.71 59.83,3.86 59.83,23.24 59.03,24.04 52.98,24.04 41.07,35.95 41.07,40.93 25.78,56.22 25.78,56.58 NRF24L01.5
SDA_GY521
  Top 0.203: NANO.A4 53.52,20.48 56.01,20.48 PH1.16 56.1,20.48 58.59,20.48 PH1.15
  Bottom 0.203: GY-521.4 5.87,35.51 7.73,35.51 16,27.24 23.02,27.24 31.29,18.97 39.73,18.97 41.15,17.55 50.67,17.55 53.52,20.4 NANO.A4
VIN
  Top 0.762: PH1.29 58.59,38.27 56.36,38.27 PH1.30 56.01,38.27 53.52,38.27 NANO.RAW 53.7,38.62 53.7,70.03 40.03,83.69 VIN.4 40.01,86.36 37.78,86.36 VIN.3 37.43,86.54 35.29,86.54 VIN.2 34.94,86.36 34.76,86.54 32.45,86.54 VIN.1 32.09,86.45 20.36,86.45 19.11,87.69 13.25,87.69 RAW.PWR

## Text on the board
tPlace: ESP_POWER | 2k | 1k | VIN | GPIO0 | RX | D- | GPIO2 | D+ | RST | NC | TX | IRQ | MISO | MOSI | SCK | CSN | CE | VCC | GND | INT | INT | ADO | 5V | 5V | DTR | ADO | LoRa | VCC | RX | XCL | DTR_RST | GND | GND | XCL | 3.3V | TX | VIN | TX | TX | XDA | D1 | 5 | 3 | 1 | D+ | XDA | SDA | AUX | RX | 6 | 4 | 2 | GND | D- | RX | 5V | D0 | RST | DTR | 3.3V | SCL | TXD | RST | 5V | GND | RXD | 5V | 3.3V | GND | GND | SWITCH | A7 | VCC | M1 | INT0 | D2 | ~INT1 | A6 | connected / to board / _power | M0 | D3 | NANO | RST | A5 | D4 | SCL | ~ | 4.7K | 4.7K | A4 | 0 | D5 | SDA | NSS | 1 | ~ | A3 | D6 | SCK | 3V3 | MOSI | A2 | 2 | D7 | MISO | OFF | 3 | MISO | A1 | D8 | MOSI~ | 5V | 5V | SCK | ~ | A0 | D9 | SS~ | VCC | PRO / MINI | 5 | AREF | ~SS | D10 | GND | 3.3V | 4 | 3.3V | BOARD_POWER | ~MOSI | D11 | D13 | MISO | D12 | SCK | RA02 / POW
bPlace: OFF | 5V | VCC | 3.3V
silktop: TOP
silkbottom: BOT